# Altium PCB TTeC_PCB2.PcbDoc
Units mm, origin at the board's own origin, x right, y up, seen from the top; angles counter-clockwise.
Board outline 95.7 x 90 mm, 2 copper layers (Top Layer, Bottom Layer), stack 1.582 mm thick; 5 components, 19 nets, 168 pads, 661 vias.
Unrouted connection lines stored in the file: 8.
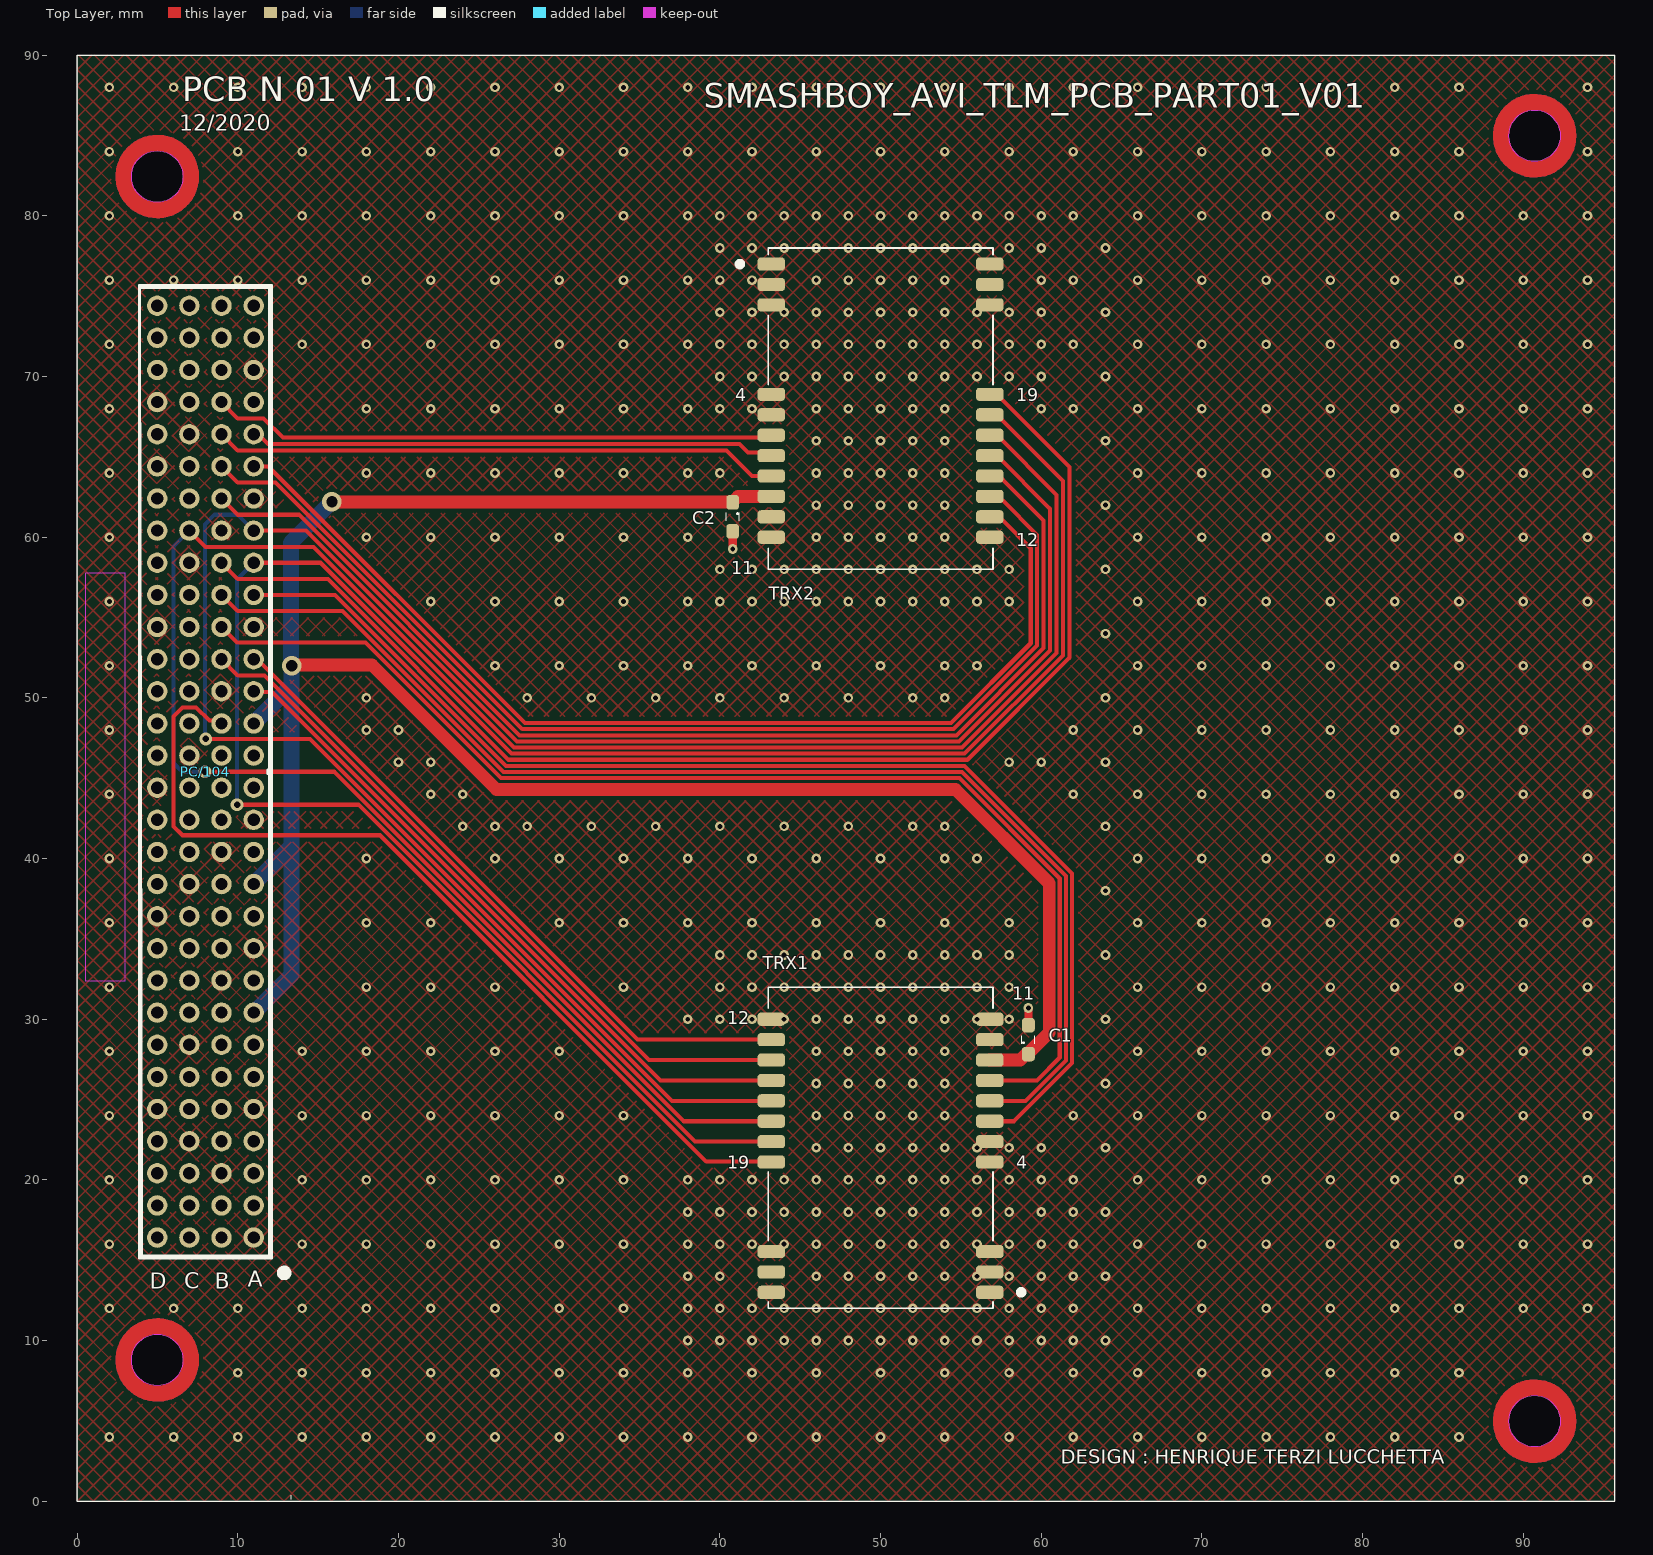
[diagram p0: Top Layer view]
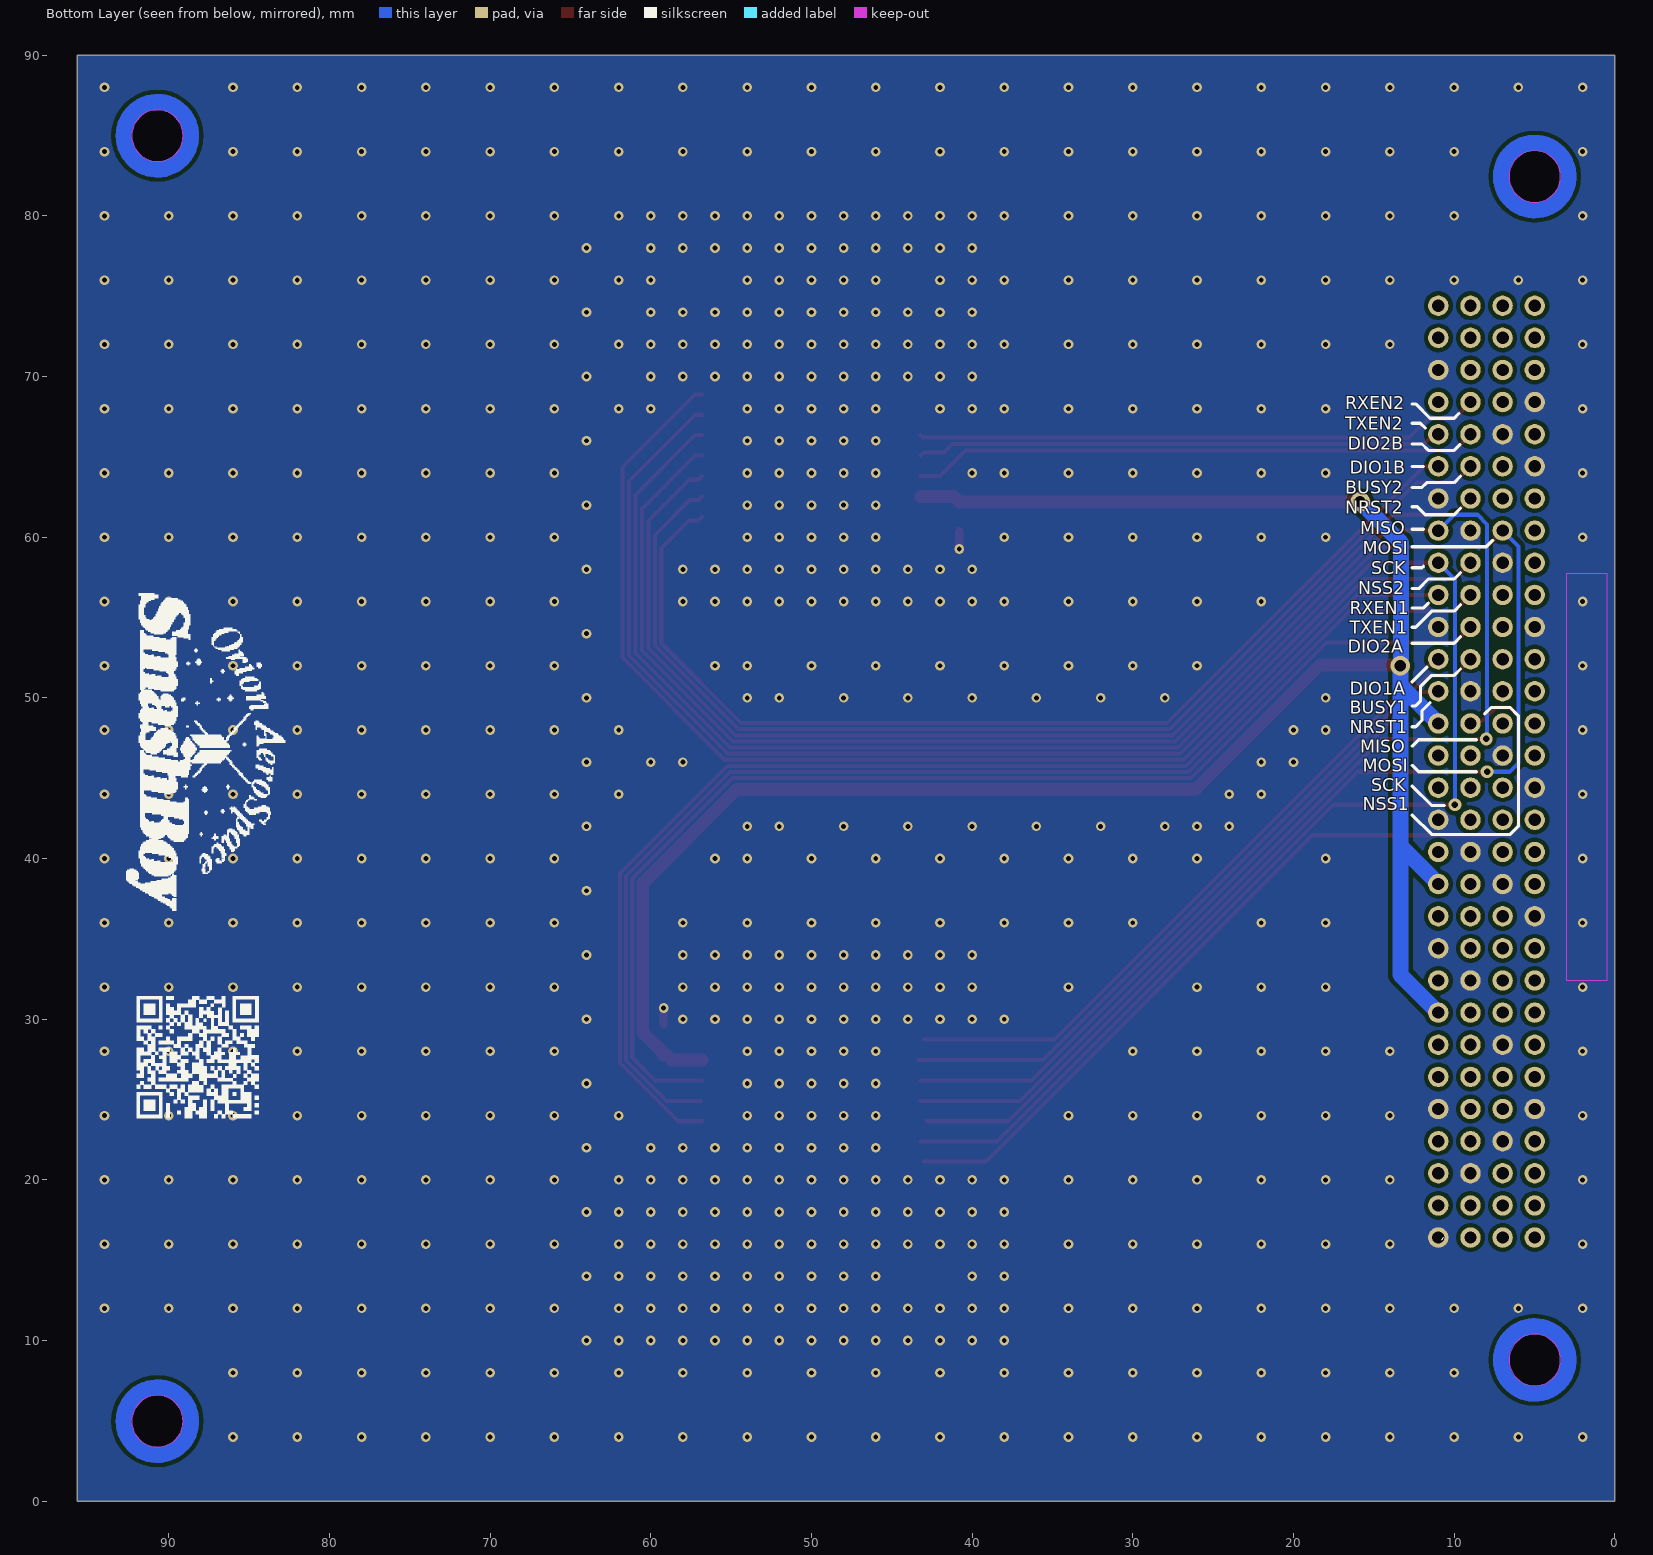
[diagram p1: Bottom Layer view, seen from below]
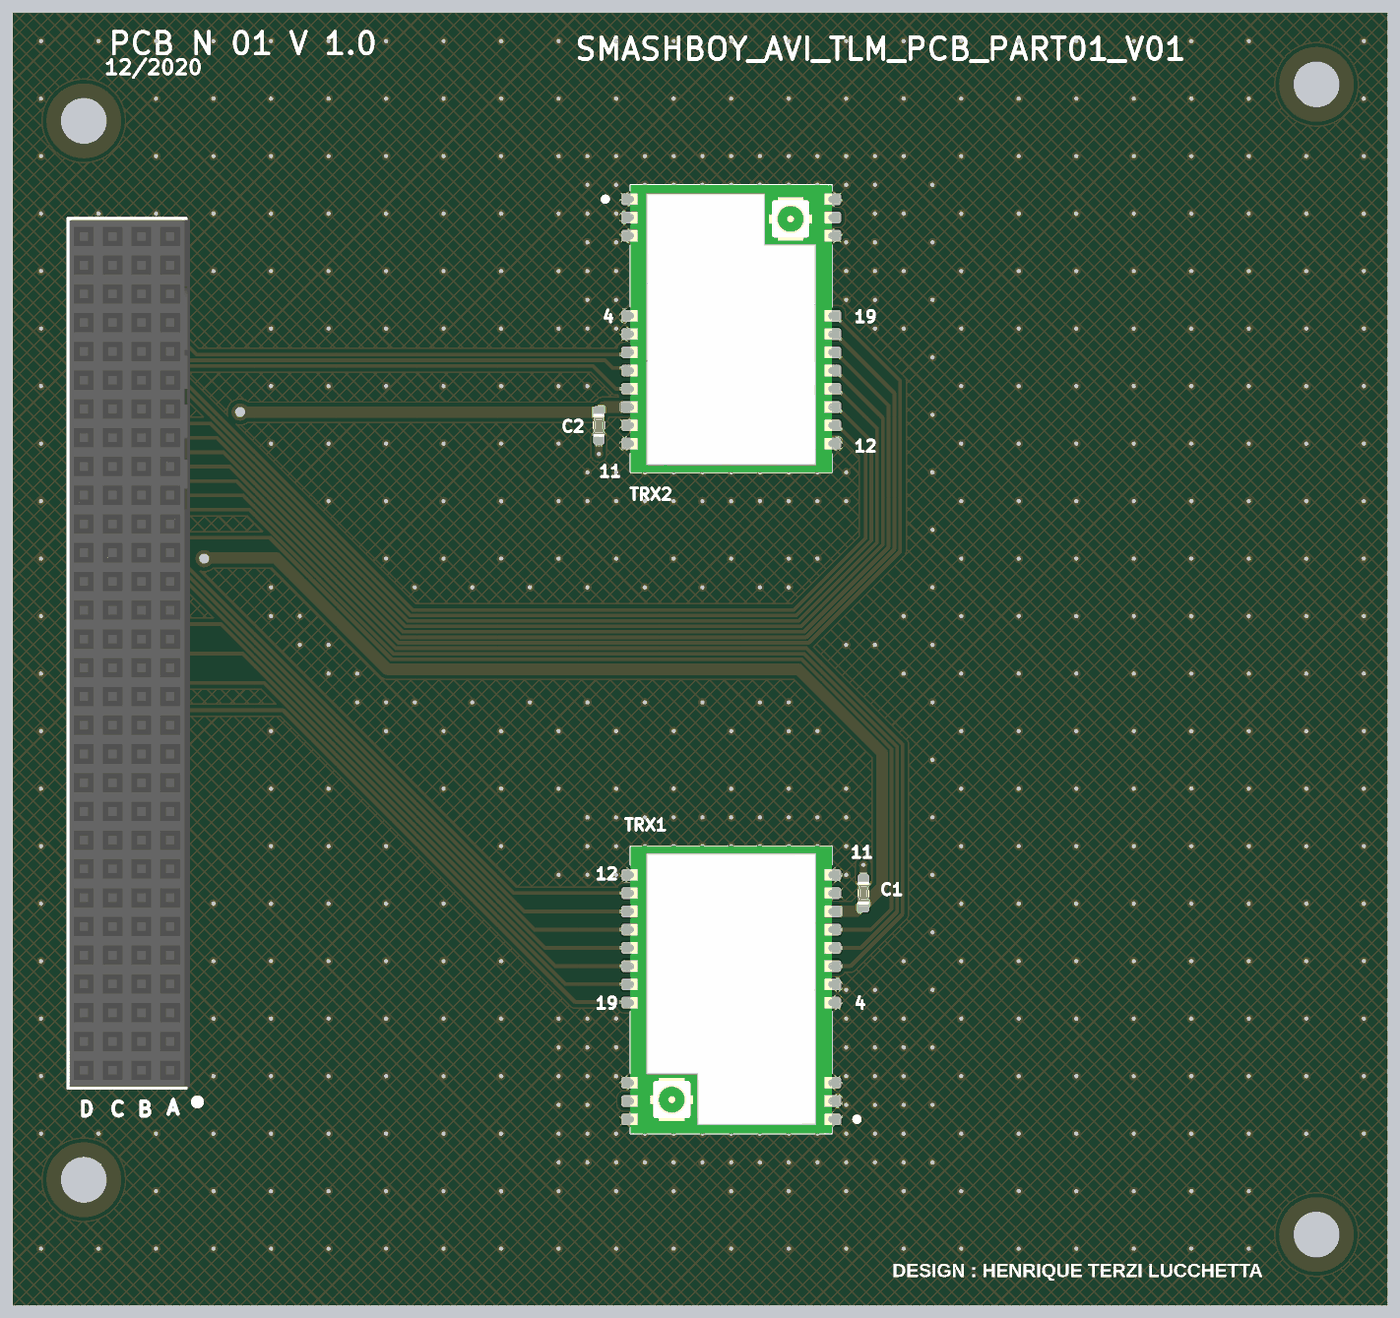
[diagram p2: 3D render of the assembled board from above, using the file's embedded part models]

## Layer stack, top to bottom
Top Solder: solder mask 0.01, Solder Resist, Dk 3.5
Top Layer: signal copper 0.036
Dielectric 1: dielectric 1.51, FR-4, Dk 4.8
Bottom Layer: signal copper 0.036
Bottom Solder: solder mask 0.01, Solder Resist, Dk 3.5

## Board outline
0,0 95.7,0 95.7,90 0,90
cut-out: 3.38,82.45 cw(c4.98,82.45) 4.98,84.05 cw(c4.98,82.45) 6.58,82.45 cw(c4.98,82.45) 4.98,80.85 cw(c4.98,82.45)
cut-out: 89.11,84.99 cw(c90.71,84.99) 90.71,86.59 cw(c90.71,84.99) 92.31,84.99 cw(c90.71,84.99) 90.71,83.39 cw(c90.71,84.99)
cut-out: 89.11,4.98 cw(c90.71,4.98) 90.71,6.58 cw(c90.71,4.98) 92.31,4.98 cw(c90.71,4.98) 90.71,3.38 cw(c90.71,4.98)
cut-out: 3.38,8.79 cw(c4.98,8.79) 4.98,10.39 cw(c4.98,8.79) 6.58,8.79 cw(c4.98,8.79) 4.98,7.19 cw(c4.98,8.79)

## Design rules (kind name [scope] priority, off if disabled: settings)
Clearance Clearance_Defferents [All] p1: gap=0.254 ignorepadtopadclearanceinfootprint=FALSE except(0.127: Arc-Arc Arc-Track Track-Track SMDPad-SMDPad; 0.15: Arc-THPad Track-THPad; 0.2: Arc-SMDPad Track-SMDPad; 0.5: SMDPad-THPad THPad-THPad Via-Via)
HoleSize [All] p1: absolutevalues=TRUE maxlimit=6.3 minlimit=0.025 maxpercent=80.000 minpercent=20.000
HoleToHoleClearance [All] p1: gap=0.5 allowstackedmicrovias=TRUE
PlaneConnect [All] p1: planeconnectstyle=Direct reliefexpansion=0.508 reliefentries=4 reliefconductorwidth=0.254 reliefairgap=0.254
PolygonConnect [All] p1: connectstyle=Direct reliefconductorwidth=0.254 reliefentries=4 polygonreliefangle="45 Angle" airgapwidth=0.254
RoutingVias [All] p1: holewidth=0.4 width=0.8 viastyle="Through Hole" minholewidth=0.3 minwidth=0.6 maxholewidth=0.8 maxwidth=1.2
SolderMaskExpansion [All] p1: expansion=0.102 istentingtop=FALSE
Width [All] p1: maxlimit=2 minlimit=0.127 preferedwidth=0.254
27 further rules are at their usual default settings.

## Components (designator, comment, footprint, x,y, rotation, side; value= is the part's Value field where it differs from the comment)
C1 "100nF" CAP0603_060 59.2,28.73 r90 top locked
C2 "100nF" CAP0603_060 40.8,61.27 r270 top locked
PC/104 "1375799-1" 1375799-1 4.98,16.41 r0 top locked
TRX1 "E22-900M22S" E22-900M22S 50,21.5 r0 top locked
TRX2 "E22-900M22S" E22-900M22S 50,68.5 r180 top locked

## Footprints (in the part's own frame and the unit in brackets; to place one, negate y for a bottom-side part, rotate by r counter-clockwise, add the part's x,y. Pads: shape width x height; smd on the part's side, far side on the other; paste and mask are expansions set on the pad)
1375799-1 [mm] "PC/104 120 Position  2mm"
  round 1.27 hole 0.762 mask+0: 1(6,0) 2(6,2) 3(6,4) 4(6,6) 5(6,8) 6(6,10) 7(6,12) 8(6,14) 9(6,16) 10(6,18) 11(6,20) 12(6,22) 13(6,24) 14(6,26) 15(6,28) 16(6,30) 17(6,32) 18(6,34) 19(6,36) 20(6,38) 21(6,40) 22(6,42) 23(6,44) 24(6,46) 25(6,48) 26(6,50) 27(6,52) 28(6,54) 29(6,56) 30(6,58) 31(4,0) 32(4,2) 33(4,4) 34(4,6) 35(4,8) 36(4,10) 37(4,12) 38(4,14) 39(4,16) 40(4,18) 41(4,20) 42(4,22) 43(4,24) 44(4,26) 45(4,28) 46(4,30) 47(4,32) 48(4,34) 49(4,36) 50(4,38) 51(4,40) 52(4,42) 53(4,44) 54(4,46) 55(4,48) 56(4,50) 57(4,52) 58(4,54) 59(4,56) 60(4,58) 61(2,0) 62(2,2) 63(2,4) 64(2,6) 65(2,8) 66(2,10) 67(2,12) 68(2,14) 69(2,16) 70(2,18) 71(2,20) 72(2,22) 73(2,24) 74(2,26) 75(2,28) 76(2,30) 77(2,32) 78(2,34) 79(2,36) 80(2,38) 81(2,40) 82(2,42) 83(2,44) 84(2,46) 85(2,48) 86(2,50) 87(2,52) 88(2,54) 89(2,56) 90(2,58) 91(0,0) 92(0,2) 93(0,4) 94(0,6) 95(0,8) 96(0,10) 97(0,12) 98(0,14) 99(0,16) 100(0,18) 101(0,20) 102(0,22) 103(0,24) 104(0,26) 105(0,28) 106(0,30) 107(0,32) 108(0,34) 109(0,36) 110(0,38) 111(0,40) 112(0,42) 113(0,44) 114(0,46) 115(0,48) 116(0,50) 117(0,52) 118(0,54) 119(0,56) 120(0,58)
  silkscreen extent -1.13,-2.4 8.1,59.28, body extent -1,-1.15 7.39,59.15, height 9.45
CAP0603_060 [mm]
  rrect50% 0.9x0.8 smd: 1(-0.9,0) 2(0.9,0)
  silkscreen extent -0.25,-0.4 0.25,0.4, body extent -0.8,-0.4 0.8,0.4, height 0.6
E22-900M22S [mm]
  rrect50% 1.7x0.82 smd: 1(6.8,-8.5) 2(6.8,-7.23) 3(6.8,-5.96) 4(6.8,-0.39) 5(6.8,0.88) 6(6.8,2.15) 7(6.8,3.42) 8(6.8,4.69) 9(6.8,5.96) 10(6.8,7.23) 11(6.8,8.5) 12(-6.8,8.5) 13(-6.8,7.23) 14(-6.8,5.96) 15(-6.8,4.69) 16(-6.8,3.42) 17(-6.8,2.15) 18(-6.8,0.88) 19(-6.8,-0.39) 20(-6.8,-5.96) 21(-6.8,-7.23) 22(-6.8,-8.5)
  silkscreen extent -7,-9.5 8.9,10.5, body extent -7.01,-9.5 7.01,10.5, height 3

## Part data
C1 C2: library part CAP0603, "Capacitor SDM 0603"
PC/104: "AMPMODU PC/104, PC/104 Connectors, Board-to-Board, 120 Position, 2mm [.079in] Centerline, Printed Circuit Board, 3A Contact Current Rating (Max)"
TRX1 TRX2: "Transreceptor RF 900MHz. / Comunicação: SPI. / Tensão: 3.3V. / Potência: 22dBm. / LoRa, GFSK. / SMD"

## Via types
v1: diameter 0.6, hole 0.3, Top Layer to Bottom Layer, tented both sides, 656 vias
v2: diameter 0.8, hole 0.4, Top Layer to Bottom Layer, tented both sides, 3 vias
v3: diameter 1.2, hole 0.7, Top Layer to Bottom Layer, tented both sides, 2 vias

## Nets (pads, with @x,y where several pads share a name; then routed paths per layer and width w, separated by ;. In a path a pad name is that pad's centre, name@x,y a point inside that pad or via, vN(x,y) a via of type N, cw(c..) or ccw(c..) an arc to the next point about the centre after c; other vN are vias at no path point)
GND: C1.2 C2.2 PC/104.1 PC/104.5 PC/104.10 PC/104.14 PC/104.20 PC/104.24 PC/104.28 PC/104.33 PC/104.39 PC/104.43 PC/104.48 PC/104.53 PC/104.64 PC/104.67 PC/104.72 PC/104.76 PC/104.82 PC/104.86 PC/104.95 PC/104.101 PC/104.105 PC/104.110 PC/104.115 PC/104.117 TRX1.1 TRX1.2 TRX1.3 TRX1.4 TRX1.5 TRX1.10 TRX1.11 TRX1.12 TRX1.20 TRX1.22 TRX2.1 TRX2.2 TRX2.3 TRX2.4 TRX2.5 TRX2.10 TRX2.11 TRX2.12 TRX2.20 TRX2.22 | length 2.4
  Top Layer w0.254: PC/104.1@10.98,16.187 11.049,16.256 10.98,16.325 PC/104.1
  Top Layer w0.508: v1(40.8,59.27) C2.2 ; C1.2@59.2,29.68 v1(59.2,30.7)
  other v1: 2,4 6,4 10,4 14,4 18,4 22,4 26,4 30,4 34,4 38,4 42,4 46,4 50,4 54,4 58,4 62,4 66,4 70,4 74,4 78,4 82,4 86,4 10,8 14,8 18,8 22,8 26,8 30,8 34,8 38,8 42,8 46,8 50,8 54,8 58,8 62,8 66,8 70,8 74,8 78,8 82,8 86,8 38,10 40,10 42,10 44,10 46,10 48,10 50,10 52,10 54,10 56,10 58,10 60,10 62,10 64,10 2,12 6,12 10,12 14,12 18,12 22,12 26,12 30,12 34,12 38,12 40,12 42,12 44,12 46,12 48,12 50,12 52,12 54,12 56,12 58,12 60,12 62,12 66,12 70,12 74,12 78,12 82,12 86,12 90,12 94,12 38,14 40,14 46,14 48,14 50,14 52,14 54,14 56,14 58,14 60,14 62,14 64,14 2,16 14,16 18,16 22,16 26,16 30,16 34,16 38,16 40,16 42,16 44,16 46,16 48,16 50,16 52,16 54,16 56,16 58,16 60,16 62,16 66,16 70,16 74,16 78,16 82,16 86,16 90,16 94,16 38,18 40,18 42,18 44,18 46,18 48,18 50,18 52,18 54,18 56,18 58,18 60,18 62,18 64,18 2,20 14,20 18,20 22,20 26,20 30,20 34,20 38,20 40,20 42,20 44,20 46,20 48,20 50,20 52,20 54,20 56,20 58,20 60,20 62,20 66,20 70,20 74,20 78,20 82,20 86,20 90,20 94,20 46,22 48,22 50,22 52,22 54,22 56,22 58,22 60,22 64,22 2,24 14,24 18,24 22,24 26,24 30,24 34,24 46,24 48,24 50,24 52,24 54,24 62,24 66,24 70,24 74,24 78,24 82,24 86,24 90,24 94,24 46,26 48,26 50,26 52,26 54,26 64,26 2,28 14,28 18,28 22,28 26,28 30,28 46,28 48,28 50,28 52,28 54,28 66,28 70,28 74,28 78,28 82,28 86,28 90,28 94,28 38,30 40,30 42,30 44,30 46,30 48,30 50,30 52,30 54,30 56,30 58,30 64,30 2,32 18,32 22,32 26,32 34,32 40,32 42,32 44,32 46,32 48,32 50,32 52,32 54,32 56,32 58,32 66,32 70,32 74,32 78,32 82,32 86,32 90,32 94,32 40,34 42,34 44,34 46,34 48,34 50,34 52,34 54,34 56,34 58,34 64,34 2,36 18,36 22,36 30,36 34,36 38,36 42,36 46,36 50,36 54,36 58,36 66,36 70,36 74,36 78,36 82,36 86,36 90,36 94,36 64,38 2,40 18,40 26,40 30,40 34,40 38,40 42,40 46,40 50,40 54,40 56,40 66,40 70,40 74,40 78,40 82,40 86,40 90,40 94,40 24,42 26,42 28,42 32,42 36,42 40,42 44,42 48,42 52,42 54,42 64,42 2,44 22,44 24,44 62,44 66,44 70,44 74,44 78,44 82,44 86,44 90,44 94,44 20,46 22,46 58,46 60,46 64,46 2,48 18,48 20,48 62,48 66,48 70,48 74,48 78,48 82,48 86,48 90,48 94,48 18,50 28,50 32,50 36,50 40,50 44,50 48,50 52,50 54,50 64,50 2,52 26,52 30,52 34,52 38,52 42,52 46,52 50,52 54,52 56,52 66,52 70,52 74,52 78,52 82,52 86,52 90,52 94,52 64,54 2,56 22,56 26,56 30,56 34,56 38,56 40,56 42,56 44,56 46,56 48,56 50,56 52,56 54,56 56,56 58,56 66,56 70,56 74,56 78,56 82,56 86,56 90,56 94,56 40,58 42,58 44,58 46,58 48,58 50,58 52,58 54,58 56,58 58,58 64,58 2,60 18,60 22,60 26,60 30,60 34,60 38,60 46,60 48,60 50,60 52,60 54,60 66,60 70,60 74,60 78,60 82,60 86,60 90,60 94,60 46,62 48,62 50,62 52,62 54,62 64,62 2,64 18,64 22,64 26,64 30,64 34,64 38,64 40,64 46,64 48,64 50,64 52,64 54,64 66,64 70,64 74,64 78,64 82,64 86,64 90,64 94,64 46,66 48,66 50,66 52,66 54,66 64,66 2,68 18,68 22,68 26,68 30,68 34,68 38,68 40,68 42,68 46,68 48,68 50,68 52,68 54,68 60,68 62,68 66,68 70,68 74,68 78,68 82,68 86,68 90,68 94,68 40,70 42,70 44,70 46,70 48,70 50,70 52,70 54,70 56,70 58,70 60,70 64,70 2,72 14,72 18,72 22,72 26,72 30,72 34,72 38,72 40,72 42,72 44,72 46,72 48,72 50,72 52,72 54,72 56,72 58,72 60,72 62,72 66,72 70,72 74,72 78,72 82,72 86,72 90,72 94,72 40,74 42,74 44,74 46,74 48,74 50,74 52,74 54,74 56,74 58,74 60,74 64,74 2,76 6,76 10,76 14,76 18,76 22,76 26,76 30,76 34,76 38,76 40,76 42,76 46,76 48,76 50,76 52,76 54,76 60,76 62,76 66,76 70,76 74,76 78,76 82,76 86,76 90,76 94,76 40,78 42,78 44,78 46,78 48,78 50,78 52,78 54,78 56,78 58,78 60,78 64,78 2,80 10,80 14,80 18,80 22,80 26,80 30,80 34,80 38,80 40,80 42,80 44,80 46,80 48,80 50,80 52,80 54,80 56,80 58,80 60,80 62,80 66,80 70,80 74,80 78,80 82,80 86,80 90,80 94,80 2,84 10,84 14,84 18,84 22,84 26,84 30,84 34,84 38,84 42,84 46,84 50,84 54,84 58,84 62,84 66,84 70,84 74,84 78,84 82,84 86,84 94,84 2,88 6,88 10,88 14,88 18,88 22,88 26,88 30,88 34,88 38,88 42,88 46,88 50,88 54,88 58,88 62,88 66,88 70,88 74,88 78,88 82,88 86,88 94,88
NetC1_1: C1.1 C2.1 PC/104.8 PC/104.12 PC/104.17 PC/104.41 PC/104.45 PC/104.70 PC/104.74 PC/104.98 PC/104.103 PC/104.107 TRX1.9 TRX2.9 | length 134.5
  Top Layer w0.8: v3(13.35,52) 13.4,52.05 18.35,52.05 26.1,44.3 54.662,44.3 60.5,38.462 60.5,29.18 59.2,27.88 59.2,27.78 59.011,27.78 58.697,27.466 56.806,27.466 TRX1.9 ; v3(15.85,62.2) 15.865,62.185 40.785,62.185 C2.1 ; C2.1@40.8,62.22 41.12,62.54 TRX2.9
  Bottom Layer w1: PC/104.8 13.35,32.78 13.35,50.78 ; PC/104.17 13.35,50.78 ; PC/104.12@11,38.4 11,38.43 13.3,40.73 ; v3(15.85,62.2) 13.3,59.65 13.3,52.05 v3(13.35,52) 13.35,50.78
NetPC/104_18: PC/104.18 TRX1.15 | length 42.2
  Top Layer w0.254: PC/104.18@11.05,50.5 11.174,50.376 12.124,50.376 36.31,26.19 TRX1.15
NetPC/104_19: PC/104.19 TRX1.13 | length 41.8
  Top Layer w0.254: PC/104.19 11.19,52.41 34.87,28.73 TRX1.13@42.98,28.73
NetPC/104_21: PC/104.21 TRX1.6 | length 76.5
  Top Layer w0.254: PC/104.21 16.051,56.41 26.695,45.766 55.228,45.766 61.916,39.078 61.916,27.266 58.3,23.65 TRX1.6
NetPC/104_22: PC/104.22 TRX1.18 TRX2.18 | length 132.4
  Top Layer w0.254: v2(9.95,43.35) 17.5,43.35 38.45,22.4 43.18,22.4 TRX1.18 ; PC/104.22 15.14,58.41 27.022,46.528 55.228,46.528 61.35,52.65 61.35,63.51 57.24,67.62 TRX2.18
  Bottom Layer w0.254: v2(9.95,43.35) 9.95,57.38 PC/104.22
NetPC/104_23: PC/104.23 TRX1.16 TRX2.16 | length 132.9
  Top Layer w0.254: v2(8,47.45) 14.5,47.45 37.03,24.92 TRX1.16 ; PC/104.23 14.24,60.41 27.36,47.29 54.89,47.29 60.55,52.95 60.55,61.77 57.24,65.08 TRX2.16
  Bottom Layer w0.254: v2(8,47.45) 7.95,47.5 7.95,60.8 8.55,61.4 9.99,61.4 PC/104.23
NetPC/104_25: PC/104.25 TRX2.13 | length 66.3
  Top Layer w0.254: PC/104.25 11.89,64.41 27.867,48.433 54.383,48.433 59.35,53.4 59.35,59.3 57.615,61.035 57.035,61.035 TRX2.13
NetPC/104_26: PC/104.26 TRX2.7 | length 32.8
  Top Layer w0.254: PC/104.26 11.255,66.41 11.865,65.8 41.219,65.8 41.743,65.275 43.005,65.275 TRX2.7
NetPC/104_47: PC/104.47 TRX1.19 | length 56.1
  Top Layer w0.254: PC/104.47 8.811,48.579 8.221,48.579 7.4,49.4 6.55,49.4 6,48.85 6,42 6.55,41.45 18.85,41.45 39.15,21.15 TRX1.19@43,21.15
NetPC/104_49: PC/104.49 TRX1.14 | length 44.7
  Top Layer w0.254: PC/104.49 9.99,51.4 11.65,51.4 35.6,27.45 TRX1.14@43.35,27.45
NetPC/104_50: PC/104.50 TRX1.8 | length 74.8
  Top Layer w0.254: PC/104.50 9.94,53.45 17.934,53.45 26.38,45.004 54.912,45.004 61.154,38.762 61.154,27.604 59.74,26.19 TRX1.8
NetPC/104_51: PC/104.51 TRX1.7 | length 77
  Top Layer w0.254: PC/104.51 9.99,55.4 16.522,55.4 26.537,45.385 55.07,45.385 61.535,38.92 61.535,27.435 59.02,24.92 TRX1.7@56.87,24.92
NetPC/104_52: PC/104.52 TRX2.19 | length 79.2
  Top Layer w0.254: PC/104.52 9.99,57.4 15.6,57.4 26.853,46.147 55.397,46.147 61.75,52.5 61.75,64.38 57.24,68.89 TRX2.19
NetPC/104_54: PC/104.54 TRX2.15 | length 72
  Top Layer w0.254: PC/104.54 9.99,61.4 13.8,61.4 27.529,47.671 54.721,47.671 60.15,53.1 60.15,61.05 57.625,63.575 57.035,63.575 TRX2.15
NetPC/104_55: PC/104.55 TRX2.14 | length 70.5
  Top Layer w0.254: PC/104.55 9.99,63.4 12.35,63.4 27.698,48.052 54.552,48.052 59.75,53.25 59.75,60.15 57.595,62.305 57.035,62.305 TRX2.14
NetPC/104_56: PC/104.56 TRX2.8 | length 35.3
  Top Layer w0.254: PC/104.56 9.99,65.4 40.4,65.4 41.99,63.81 TRX2.8
NetPC/104_57: PC/104.57 TRX2.6 | length 35.2
  Top Layer w0.254: PC/104.57 9.99,67.4 11.6,67.4 12.8,66.2 43.05,66.2 TRX2.6
NetPC/104_83: PC/104.83 TRX1.17 TRX2.17 | length 138.2
  Top Layer w0.254: PC/104.83@7.3,60.3 7.3,60.09 7.99,59.4 14.7,59.4 27.191,46.909 55.059,46.909 60.95,52.8 60.95,62.64 57.24,66.35 TRX2.17 ; v2(7.95,45.4) 16,45.4 37.75,23.65 TRX1.17@42.85,23.65
  Bottom Layer w0.254: PC/104.83 6,59.43 6,45.95 6.55,45.4 v2(7.95,45.4)
pads on no net: PC/104.2 PC/104.3 PC/104.4 PC/104.6 PC/104.7 PC/104.9 PC/104.11 PC/104.13 PC/104.15 PC/104.16 PC/104.27 PC/104.29 PC/104.30 PC/104.31 PC/104.32 PC/104.34 PC/104.35 PC/104.36 PC/104.37 PC/104.38 PC/104.40 PC/104.42 PC/104.44 PC/104.46 PC/104.58 PC/104.59 PC/104.60 PC/104.61 PC/104.62 PC/104.63 PC/104.65 PC/104.66 PC/104.68 PC/104.69 PC/104.71 PC/104.73 PC/104.75 PC/104.77 PC/104.78 PC/104.79 PC/104.80 PC/104.81 PC/104.84 PC/104.85 PC/104.87 PC/104.88 PC/104.89 PC/104.90 PC/104.91 PC/104.92 PC/104.93 PC/104.94 PC/104.96 PC/104.97 PC/104.99 PC/104.100 PC/104.102 PC/104.104 PC/104.106 PC/104.108 PC/104.109 PC/104.111 PC/104.112 PC/104.113 PC/104.114 PC/104.116 PC/104.118 PC/104.119 PC/104.120 TRX1.21 TRX2.21
copper on no net: | length 105.7
  Top Layer w0.254: 6.98,50.41 7.09,50.41
  Top Layer w1: 7.08,8.79 ccw(c4.98,8.79) 7.08,8.79 ; 7.08,82.45 ccw(c4.98,82.45) 7.08,82.45 ; 92.81,4.98 ccw(c90.71,4.98) 92.81,4.98 ; 92.81,84.99 ccw(c90.71,84.99) 92.81,84.99
  Bottom Layer w1: 7.08,8.79 ccw(c4.98,8.79) 7.08,8.79 ; 7.08,82.45 ccw(c4.98,82.45) 7.08,82.45 ; 92.81,4.98 ccw(c90.71,4.98) 92.81,4.98 ; 92.81,84.99 ccw(c90.71,84.99) 92.81,84.99

## Polygon pours and split planes (outlines as drawn)
GND on Bottom Layer "NONET_L-01_P-001" (solid, remove dead copper, pour order 0): 0,90 0,0 95.7,0 95.7,90
GND on Top Layer "NONET_L-01_P-001" (hatched 45Degree grid 0.7 track 0.1, remove dead copper, pour order 1): 0,90 0,0 95.7,0 95.7,90

## Keep-outs
Keep-Out Layer:
  region: 0.51,57.77 0.51,32.385 2.995,32.385 2.995,57.765

## Silkscreen, mask and mechanical layers (free items; w line width, h text height)
Top Overlay:
  lines w0.01: 13.335,0.127 13.335,0.381
  lines w0.05: 0,0 0,90 95.7,90 95.7,0 0,0
  text "PCB N 01 V 1.0" at 6.539,87.122 h1.52
  text "SMASHBOY_AVI_TLM_PCB_PART01_V01" at 39,86.741 h1.52
  text "12/2020" at 6.35,85.3 h1
  text "4" at 40.95,68.45 h0.8
  text "19" at 58.45,68.45 h0.8
  text "12" at 58.45,59.45 h0.8
  text "11" at 40.7,57.7 h0.8
  text "11" at 58.2,31.2 h0.8
  text "12" at 40.45,29.7 h0.8
  text "19" at 40.45,20.7 h0.8
  text "4" at 58.45,20.7 h0.8
  text "DESIGN : HENRIQUE TERZI LUCCHETTA" at 61.214,2.032 h1.5
Bottom Overlay:
  drawing of 152 lines, arcs and shapes, not listed
  text "RXEN2" at 16.767,67.95 h0.8
  text "TXEN2" at 16.767,66.7 h0.8
  text "DIO2B" at 16.633,65.45 h0.8
  text "DIO1B" at 16.5,63.95 h0.8
  text "BUSY2" at 16.767,62.7 h0.8
  text "NRST2" at 16.767,61.45 h0.8
  text "MISO" at 15.834,60.2 h0.8
  text "MOSI" at 15.7,58.95 h0.8
  text "SCK" at 15.167,57.7 h0.8
  text "NSS2" at 15.967,56.45 h0.8
  text "RXEN1" at 16.5,55.2 h0.8
  text "TXEN1" at 16.5,54 h0.8
  text "DIO2A" at 16.633,52.8 h0.8
  text "DIO1A" at 16.5,50.2 h0.8
  text "BUSY1" at 16.5,49 h0.8
  text "NRST1" at 16.5,47.8 h0.8
  text "MISO" at 15.834,46.6 h0.8
  text "MOSI" at 15.7,45.4 h0.8
  text "SCK" at 15.167,44.2 h0.8
  text "NSS1" at 15.7,43 h0.8

## Text inside footprints (layer, text, board x,y; h text height)
PC/104: Top Overlay "D" at 4.503,13.235 h1; Top Overlay "C" at 6.662,13.235 h1; Top Overlay "B" at 8.567,13.235 h1; Top Overlay "A" at 10.599,13.362 h1; Mechanical 13 "*" at 12.107,13.87 h1.27 r270
TRX1: Mechanical 7 "GND" at 54,14 h1; Mechanical 7 "GND" at 54.25,20.75 h1; Mechanical 7 "GND" at 54.25,22.125 h1; Mechanical 7 "VCC" at 54,27.25 h1; Mechanical 7 "GND" at 54,12.75 h1; Mechanical 7 "GND" at 54.25,28.5 h1; Mechanical 7 "GND" at 54.25,29.75 h1; Mechanical 7 "GND" at 54,15.25 h1; Mechanical 7 "ANT" at 44.25,14 h1; Mechanical 7 "GND" at 44.25,15.25 h1; Mechanical 7 "NSS" at 44.625,20.75 h1; Mechanical 7 "SCK" at 44.625,22.125 h1; Mechanical 7 "NRST" at 44.625,25.875 h1; Mechanical 7 "BUSY" at 44.625,27.25 h1; Mechanical 7 "DIO2" at 53.75,25.875 h1; Mechanical 7 "GND" at 44.2,12.67 h1; Mechanical 7 "MISO" at 44.625,24.625 h1; Mechanical 7 "MOSI" at 44.625,23.375 h1; Mechanical 7 "DIO1" at 44.625,28.5 h1; Mechanical 7 "GND" at 44.625,29.75 h1; Mechanical 7 "RXEN" at 53.75,23.375 h1; Mechanical 7 "TXEN" at 53.75,24.625 h1
TRX2: Mechanical 7 "GND" at 46,76 h1 r180; Mechanical 7 "GND" at 45.75,69.25 h1 r180; Mechanical 7 "GND" at 45.75,67.875 h1 r180; Mechanical 7 "VCC" at 46,62.75 h1 r180; Mechanical 7 "GND" at 46,77.25 h1 r180; Mechanical 7 "GND" at 45.75,61.5 h1 r180; Mechanical 7 "GND" at 45.75,60.25 h1 r180; Mechanical 7 "GND" at 46,74.75 h1 r180; Mechanical 7 "ANT" at 55.75,76 h1 r180; Mechanical 7 "GND" at 55.75,74.75 h1 r180; Mechanical 7 "NSS" at 55.375,69.25 h1 r180; Mechanical 7 "SCK" at 55.375,67.875 h1 r180; Mechanical 7 "NRST" at 55.375,64.125 h1 r180; Mechanical 7 "BUSY" at 55.375,62.75 h1 r180; Mechanical 7 "DIO2" at 46.25,64.125 h1 r180; Mechanical 7 "GND" at 55.8,77.33 h1 r180; Mechanical 7 "MISO" at 55.375,65.375 h1 r180; Mechanical 7 "MOSI" at 55.375,66.625 h1 r180; Mechanical 7 "DIO1" at 55.375,61.5 h1 r180; Mechanical 7 "GND" at 55.375,60.25 h1 r180; Mechanical 7 "RXEN" at 46.25,66.625 h1 r180; Mechanical 7 "TXEN" at 46.25,65.375 h1 r180